# Altium PCB 变压器电源模块.PcbDoc
Units mm, origin at the board's own origin, x right, y up, seen from the top; angles counter-clockwise.
Board outline 152.4 x 101.6 mm, 2 copper layers (Top Layer, Bottom Layer); 21 components, 10 nets, 62 pads, 0 vias.
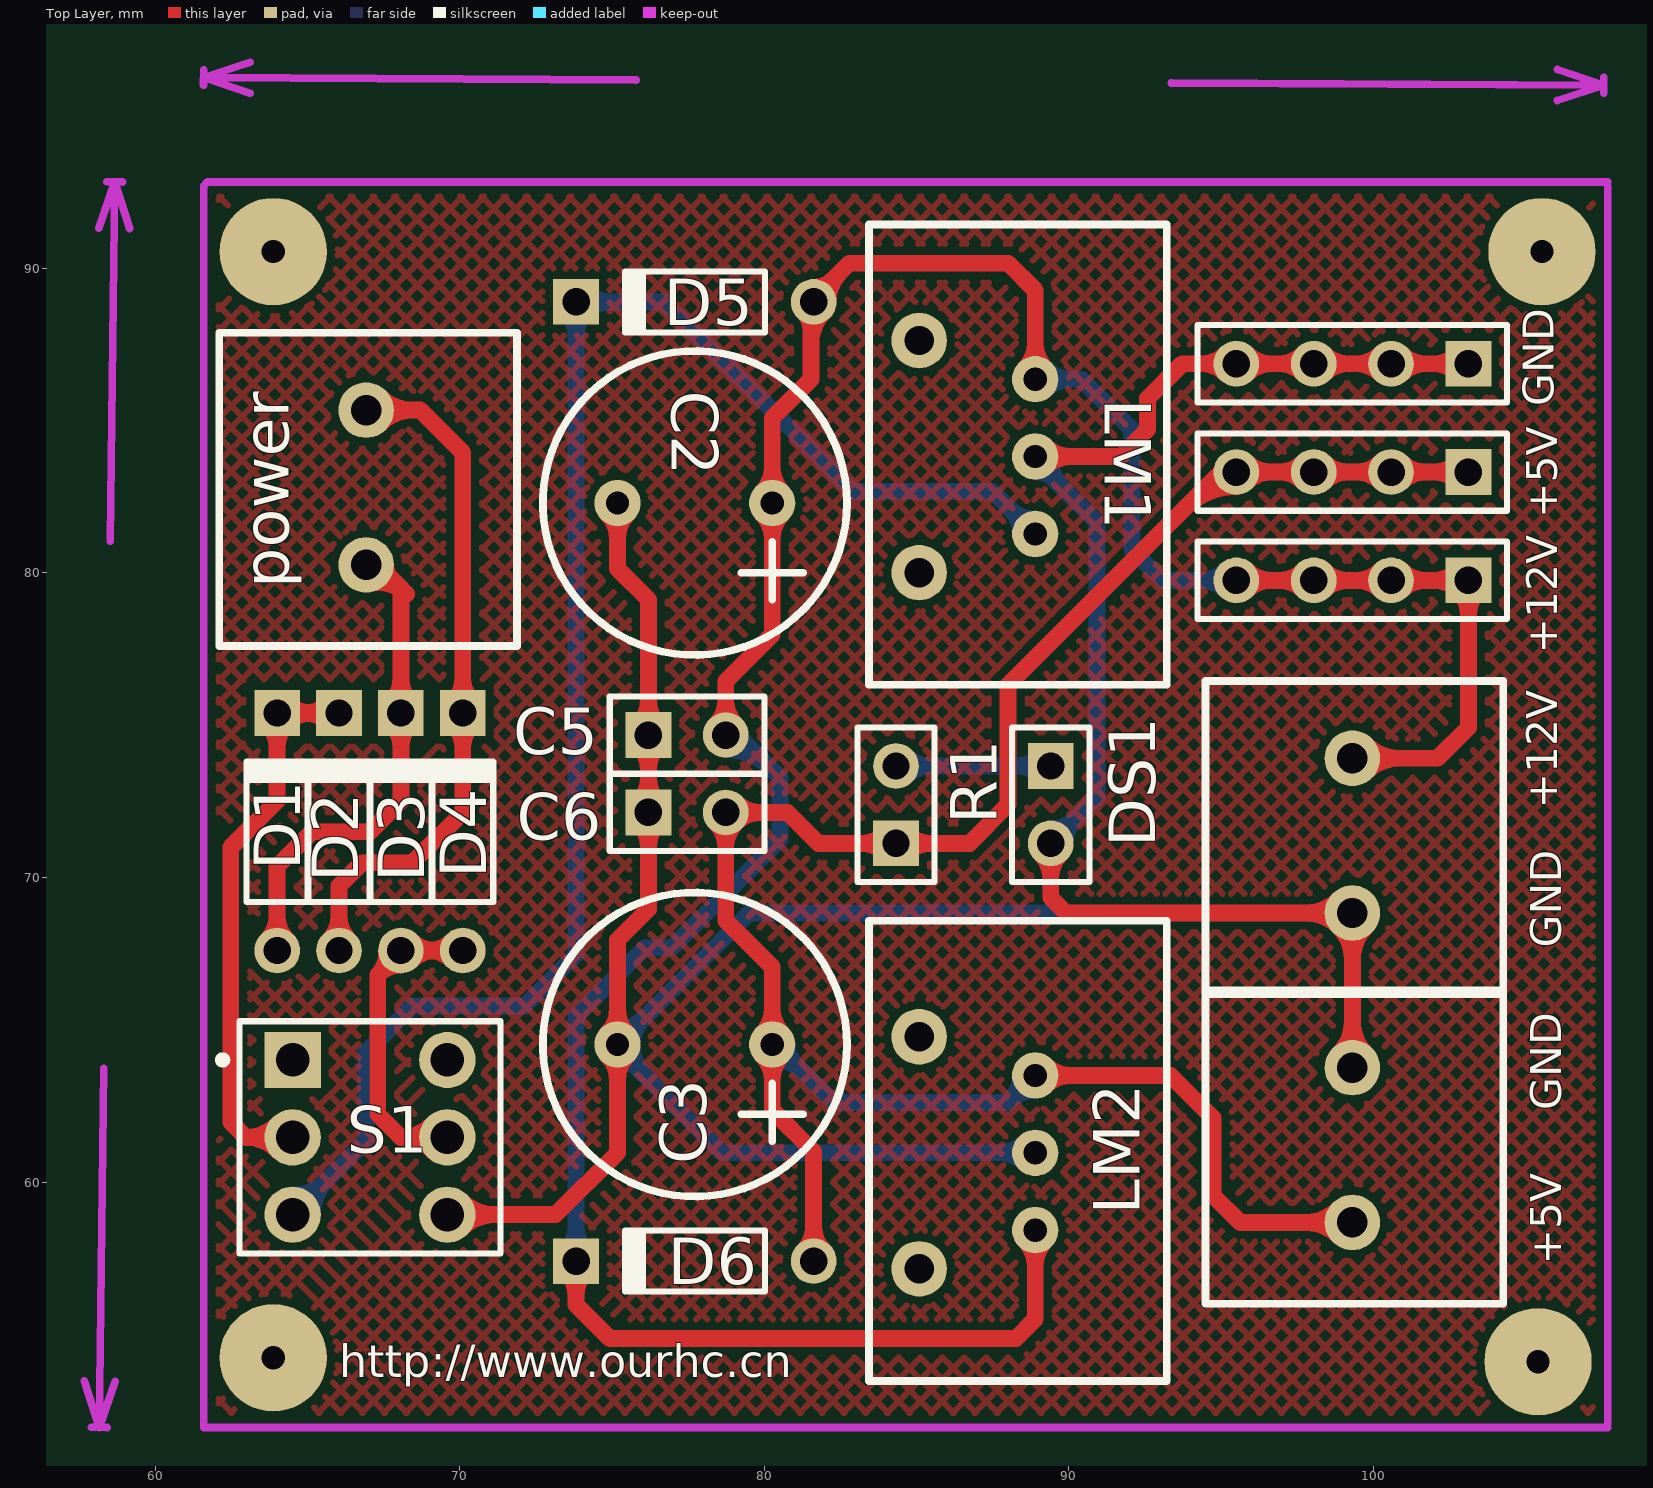
[diagram p0: Top Layer view]
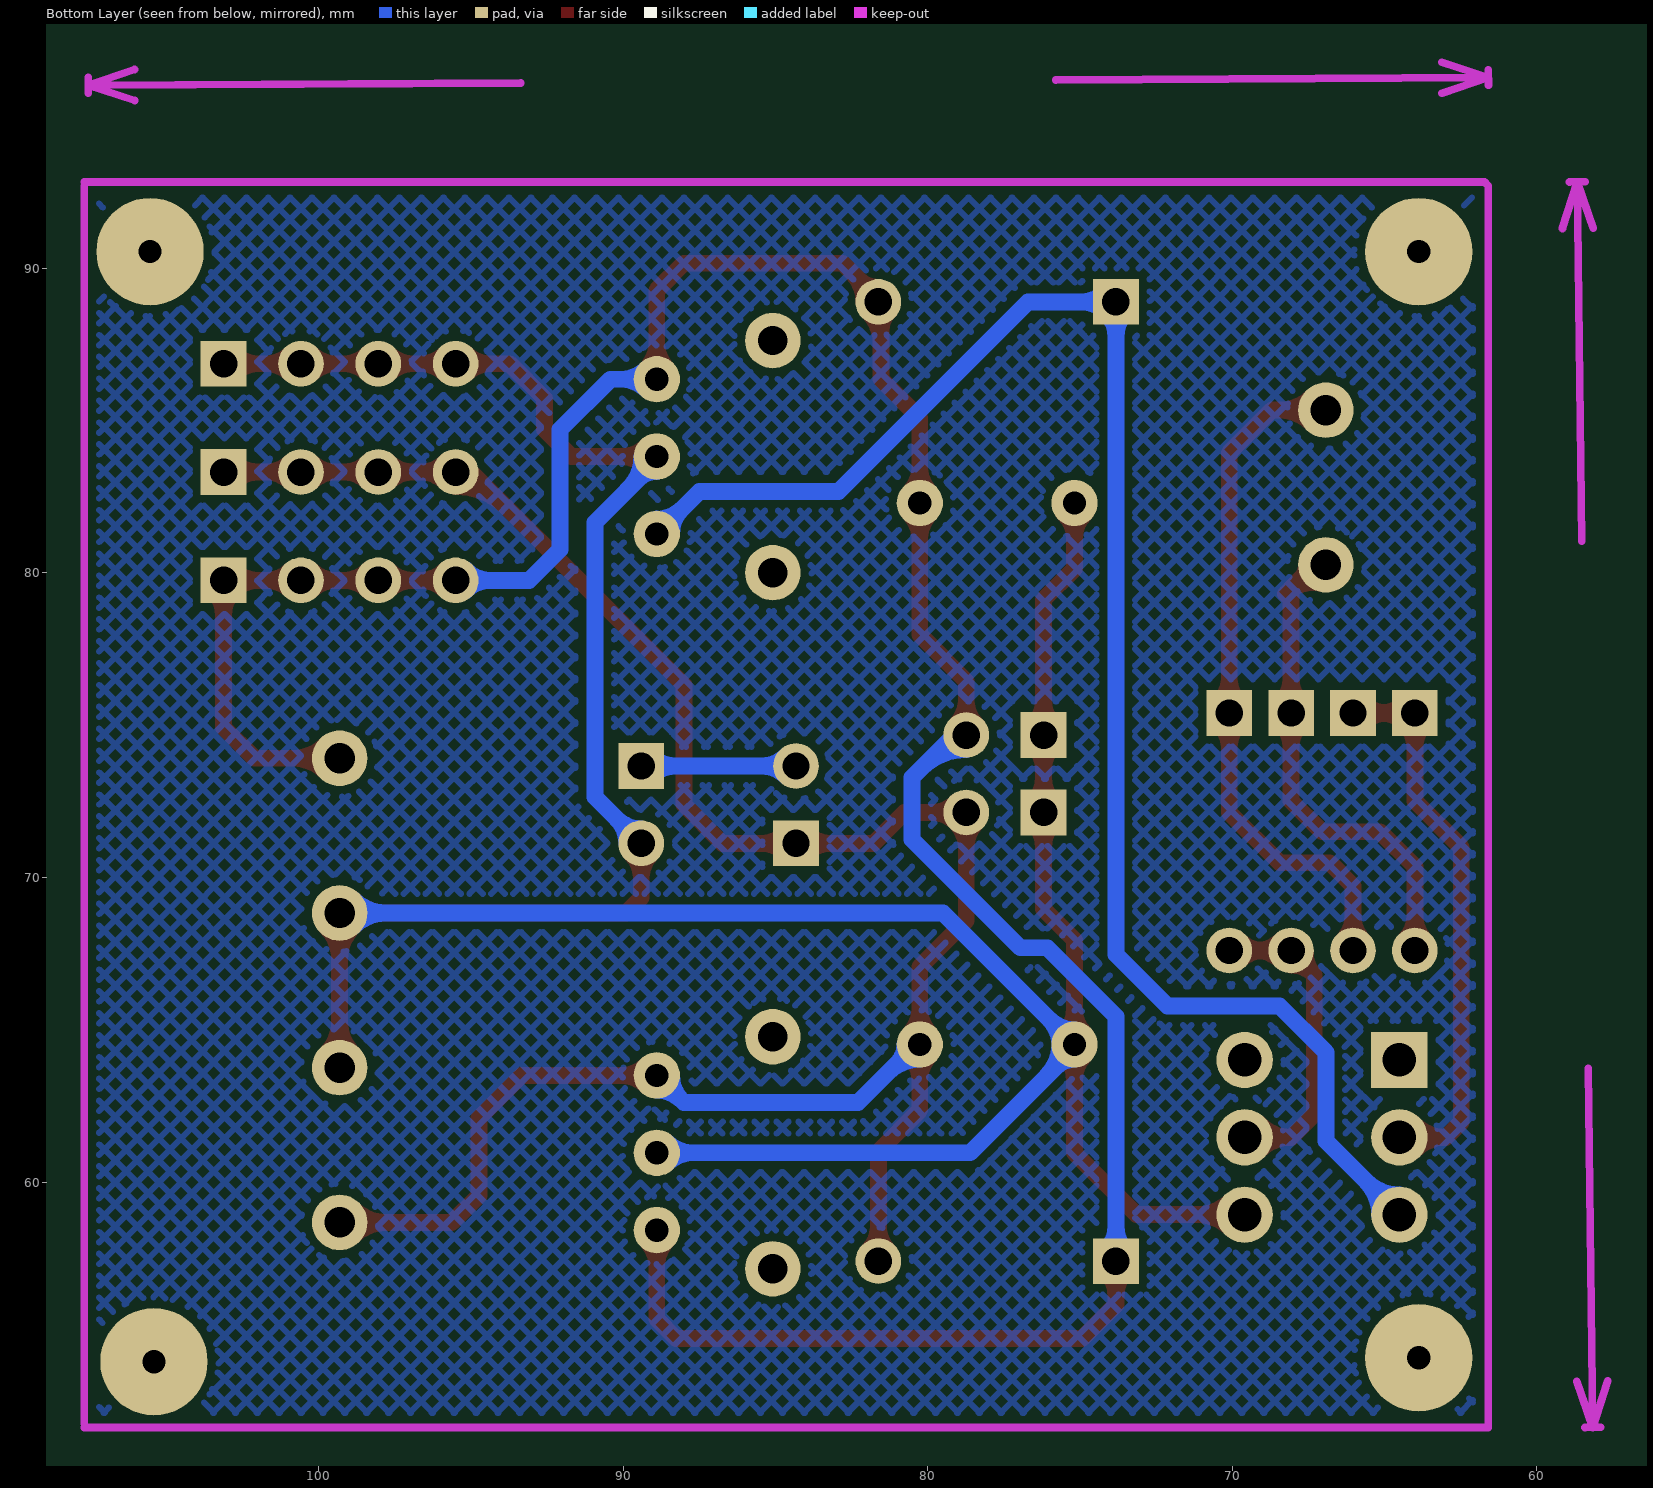
[diagram p1: Bottom Layer view, seen from below]

## Layer stack, top to bottom
Top Layer: signal copper 0.0356
Dielectric: dielectric 0.32, FR-4, Dk 4.8
Bottom Layer: signal copper 0.0356

## Board outline
25.4,25.4 177.8,25.4 177.8,127 25.4,127

## Design rules (kind name [scope] priority, off if disabled: settings)
Clearance [All] p1: gap=0.254
ComponentClearance [All] p1: gap=0.254 collisioncheckmode=3 verticalgap=0.254
PolygonConnect [All] p1: connectstyle=Relief reliefconductorwidth=0.254 reliefentries=4 polygonreliefangle="90 Angle"
RoutingVias [All] p1: holewidth=0.711 width=1.27 viastyle="Through Hole" minholewidth=0.711 minwidth=1.27 maxholewidth=0.711 maxwidth=1.27
SolderMaskExpansion [All] p1: expansion=0.102
TestPointUsage [All] p1: valid=0 allowmultiple=FALSE
Testpoint [All] p1: side=15 testpointundercomponent=TRUE minsize=1.016 maxsize=2.54 preferedsize=1.524 minholesize=0 maxholesize=1.016 preferedholesize=0.813 testpointgrid=0.025 style=1023 order=0-112345678
Width [All] p1: maxlimit=0.554 minlimit=0.554 preferedwidth=0.554
17 further rules are at their usual default settings.

## Classes and differential pairs
component class 变压器电源模块: +5V +12V C2 C3 C5 C6 D1 D2 D3 D4 D5 D6 DS1 GND LM1 LM2 power R1 S1

## Components (designator, comment, footprint, x,y, rotation, side; value= is the part's Value field where it differs from the comment)
+5V "Header 2" JK128 100.457,63.246 r0 top (schematic designator P5)
+5V "Header 4" HDR1X4 103.124,86.868 r180 top (schematic designator P3)
+12V "Header 2" JK128 100.457,73.406 r0 top (schematic designator P4)
+12V "Header 4" HDR1X4 103.124,79.756 r180 top (schematic designator P1)
C2 "" "C 220/50" 80.264,82.296 r270 top
C3 "" "C 220/50" 80.264,64.516 r270 top
C5 "" HDR1X2 76.2,74.676 r0 top
C6 "" HDR1X2 76.2,72.136 r0 top
D1 "" DIO7.8-4.6x2 64.008,71.501 r90 top
D2 "" DIO7.8-4.6x2 66.04,71.501 r90 top
D3 "" DIO7.8-4.6x2 68.072,71.501 r90 top
D4 "" DIO7.8-4.6x2 70.104,71.501 r90 top
D5 "" DIO7.8-4.6x2 77.724,88.9 r180 top
D6 "" DIO7.8-4.6x2 77.724,57.404 r180 top
DS1 "" HDR1X2 89.408,73.66 r270 top
GND "Header 4" HDR1X4 103.124,83.312 r180 top (schematic designator P2)
LM1 "" wyk 88.9,83.82 r90 top
LM2 "" wyk 88.9,60.96 r90 top
power "Header 2" JK128 68.072,84.836 r0 top
R1 "10k" HDR1X2 84.328,71.12 r90 top
S1 "" DPDT-6 67.056,61.468 r0 top

## Footprints (in the part's own frame and the unit in brackets; to place one, negate y for a bottom-side part, rotate by r counter-clockwise, add the part's x,y. Pads: shape width x height; smd on the part's side, far side on the other; paste and mask are expansions set on the pad)
"C 220/50" [mil]
  round 60 hole 30: 1(0,0) 2(0,-200)
  silkscreen extent -197,-296 197,97
DIO7.8-4.6x2 [mm] "Diode, Axial; Body 4.6 x 1.9 mm (LxDia. max), Lead Dia. 0.53 mm (max)"
  round 1.5 hole 0.9: 1(-3.9,0)
  rect 1.5x1.5 hole 0.9: 2(3.9,0)
  silkscreen extent -2.3,-1 2.4,1
DPDT-6 [mm] "Double-Pole, Double-Throw Switch; 6 Leads"
  rect 1.85x1.85 hole 1.1: 1(-2.54,2.54)
  round 1.85 hole 1.1: 2(-2.54,0) 3(-2.54,-2.54) 4(2.54,-2.54) 5(2.54,0) 6(2.54,2.54)
  silkscreen extent -4.96,-3.81 4.28,3.81
HDR1X2 [mm]
  rect 1.5x1.5 hole 0.9: 1(0,0)
  round 1.5 hole 0.9: 2(2.54,0)
  silkscreen extent -1.27,-1.27 3.81,1.27
HDR1X4 [mm]
  rect 1.5x1.5 hole 0.9: 1(0,0)
  round 1.5 hole 0.9: 2(2.54,0) 3(5.08,0) 4(7.62,0)
  silkscreen extent -1.27,-1.27 8.89,1.27
JK128 [mil]
  round 71.81 hole 39.37: 1(-45,20) 2(-45,-180)
  silkscreen extent -235,-285 150,120
wyk [mil]
  round 71.81 hole 37.87: 0(-150,150) 0(150,150)
  round 60 hole 30: 1(-100,0) 2(100,0) 3(0,0)
  silkscreen extent -295,-170 300,215

## Part data
+5V +12V power: "Header, 2-Pin"
+5V +12V GND: "Header, 4-Pin"
C2 C3: library part "Cap Pol1", "Polarized Capacitor (Radial)"
C5 C6: library part Cap, "Capacitor"
D1 D2 D3 D4 D5 D6: library part "Diode 1N4007", "1 Amp General Purpose Rectifier"
DS1: library part LED0, "Typical INFRARED GaAs LED"
LM1 LM2: library part "Volt Reg", "Voltage Regulator"
R1: library part RES1
S1: library part "SW DPDT", "Switch"

## Free pads (board coordinates)
  round 3.524 hole 0.762: 0(63.881,54.229) 0(63.881,90.551) 0(105.41,54.102) 0(105.537,90.551)

## Nets (pads, with @x,y where several pads share a name; then routed paths per layer and width w, separated by ;. In a path a pad name is that pad's centre, name@x,y a point inside that pad or via, vN(x,y) a via of type N, cw(c..) or ccw(c..) an arc to the next point about the centre after c; other vN are vias at no path point)
A05: +5V.2@99.314,58.674 C3.1 C6.2 D6.1 GND.1 GND.2 GND.3 GND.4 LM2.2 R1.1 | length 106
  Top Layer w0.554: C6.2@78.406,71.802 cw(c77.598,70.994) 78.74,70.994 cw(c79.882,70.994) 79.074,71.802 cw(c79.882,70.994) 79.882,72.136 cw(c79.882,73.278) C6.2@79.074,72.47 ; C6.2 80.772,72.136 81.788,71.12 86.741,71.12 88.011,72.39 88.011,76.327 94.996,83.312 GND.1 ; C6.2@78.74,72.39 78.74,68.58 80.264,67.056 80.264,62.357 81.624,60.997 D6.1 ; C3.1@79.921,64.173 cw(c79.093,63.345) 80.264,63.345 cw(c81.435,63.345) C3.1@80.607,64.173 ; C3.1@79.921,64.859 ccw(c79.093,65.687) 80.264,65.687 ccw(c81.435,65.687) C3.1@80.607,64.859 ; D6.1@81.29,57.738 ccw(c80.482,58.546) 81.624,58.546 ccw(c82.766,58.546) D6.1@81.958,57.738 ; R1.1@83.994,70.786 ccw(c83.186,69.978) 83.186,71.12 ccw(c83.186,72.262) R1.1@83.994,71.454 ; R1.1@84.662,70.786 cw(c85.47,69.978) 85.47,71.12 cw(c85.47,72.262) R1.1@84.662,71.454 ; LM2.2 93.345,63.5 94.742,62.103 94.742,59.563 95.631,58.674 +5V.2@99.314,58.674 ; LM2.2@89.243,63.157 cw(c90.071,62.329) 90.071,63.5 cw(c90.071,64.671) LM2.2@89.243,63.843 ; 93.829,82.145 cw(c95.504,80.471) GND.4@95.504,82.839 ; 94.775,83.091 cw(c95.504,82.362) GND.4@95.504,83.393 ; GND.4@95.838,82.978 cw(c96.646,82.17) 96.646,83.312 cw(c96.646,84.454) GND.4@95.838,83.646 ; GND.3@97.71,82.978 ccw(c96.902,82.17) 96.902,83.312 ccw(c96.902,84.454) GND.3@97.71,83.646 ; GND.3@98.378,82.978 cw(c99.186,82.17) 99.186,83.312 cw(c99.186,84.454) GND.3@98.378,83.646 ; +5V.2@98.865,58.225 ccw(c97.781,57.141) 97.781,58.674 ccw(c97.781,60.207) +5V.2@98.865,59.123 ; GND.2@100.25,82.978 ccw(c99.442,82.17) 99.442,83.312 ccw(c99.442,84.454) GND.2@100.25,83.646 ; GND.2@100.918,82.978 cw(c101.726,82.17) 101.726,83.312 cw(c101.726,84.454) GND.2@100.918,83.646 ; GND.1@102.79,82.978 ccw(c101.982,82.17) 101.982,83.312 ccw(c101.982,84.454) GND.1@102.79,83.646
  Bottom Layer w0.554: C3.1@80.264,64.031 cw(c80.264,62.553) 81.309,63.598 ; C3.1 80.391,64.516 82.296,62.611 88.011,62.611 LM2.2 ; C3.1@80.749,64.516 ccw(c81.613,64.516) 81.002,63.905 ; LM2.2@88.415,63.5 cw(c87.244,63.5) 88.072,62.672 cw(c88.9,61.844) LM2.2@88.9,63.015
A12: +12V.1 +12V.2@100.584,79.756 +12V.3 +12V.4 C2.1 C5.2 D5.1 D6.2 LM1.2 LM2.1 | length 133.1
  Top Layer w0.554: D6.2@73.49,57.07 cw(c72.682,56.262) 73.824,56.262 cw(c74.966,56.262) D6.2@74.158,57.07 ; D6.2 73.824,55.97 74.93,54.864 88.265,54.864 88.9,55.499 LM2.1 ; C5.2@78.406,75.01 ccw(c77.598,75.818) 78.74,75.818 ccw(c79.882,75.818) C5.2@79.074,75.01 ; C5.2 78.74,76.454 80.264,77.978 80.264,85.09 81.534,86.36 81.534,88.81 D5.1 81.624,88.99 82.804,90.17 88.011,90.17 88.9,89.281 LM1.2 ; C2.1@79.921,81.953 cw(c79.093,81.125) 80.264,81.125 cw(c81.435,81.125) C2.1@80.607,81.953 ; C2.1@79.921,82.639 ccw(c79.093,83.467) 80.264,83.467 ccw(c81.435,83.467) C2.1@80.607,82.639 ; D5.1@81.29,88.566 cw(c80.699,87.975) 81.534,87.975 ; 81.534,87.541 cw(c82.983,87.541) D5.1@81.958,88.566 ; D5.1@81.624,89.373 ccw(c81.624,90.298) 82.278,89.644 ; D5.1@82.097,88.9 cw(c83.456,88.9) 82.495,89.861 ; LM2.1@88.557,58.077 cw(c87.729,57.249) 88.9,57.249 cw(c90.071,57.249) LM2.1@89.243,58.077 ; LM1.2@88.557,86.703 ccw(c87.729,87.531) 88.9,87.531 ccw(c90.071,87.531) LM1.2@89.243,86.703 ; +12V.4 103.124,79.756 103.124,74.93 102.108,73.914 +12V.1@99.314,73.914 ; +12V.4@95.838,79.422 cw(c96.646,78.614) 96.646,79.756 cw(c96.646,80.898) +12V.4@95.838,80.09 ; +12V.3@97.71,79.422 ccw(c96.902,78.614) 96.902,79.756 ccw(c96.902,80.898) +12V.3@97.71,80.09 ; +12V.3@98.378,79.422 cw(c99.186,78.614) 99.186,79.756 cw(c99.186,80.898) +12V.3@98.378,80.09 ; +12V.1@99.763,73.465 cw(c100.847,72.381) 100.847,73.914 cw(c100.847,75.447) +12V.1@99.763,74.363 ; +12V.2@100.25,79.422 ccw(c99.442,78.614) 99.442,79.756 ccw(c99.442,80.898) +12V.2@100.25,80.09 ; +12V.2@100.918,79.422 cw(c101.726,78.614) 101.726,79.756 cw(c101.726,80.898) +12V.2@100.918,80.09 ; +12V.1@102.79,80.09 cw(c101.982,80.898) 101.982,79.756 cw(c101.982,78.614) 102.79,79.422 cw(c101.982,78.614) 103.124,78.614 cw(c104.266,78.614) +12V.1@103.458,79.422
  Bottom Layer w0.554: D6.2@73.49,57.738 ccw(c72.682,58.546) 73.824,58.546 ccw(c74.966,58.546) D6.2@74.158,57.738 ; D6.2 73.824,65.442 76.073,67.691 76.962,67.691 80.518,71.247 80.518,73.279 79.121,74.676 C5.2 ; C5.2@78.74,74.203 cw(c78.74,72.141) 80.198,73.599 ; LM1.2 90.424,86.36 92.075,84.709 92.075,80.772 93.091,79.756 +12V.4 ; LM1.2@89.243,86.017 cw(c90.071,85.189) 90.071,86.36 cw(c90.071,87.531) LM1.2@89.243,86.703 ; +12V.4@95.17,79.422 ccw(c94.362,78.614) 94.362,79.756 ccw(c94.362,80.898) +12V.4@95.17,80.09
AGND: +5V.1 +5V.2@100.584,86.868 +5V.3 +5V.4 +12V.2@99.314,68.834 C2.2 C3.2 C5.1 C6.1 DS1.2 LM1.3 LM2.3 S1.4 | length 167.1
  Top Layer w0.554: S1.4 73.152,58.928 75.184,60.96 75.184,67.945 76.2,68.961 76.2,79.121 75.184,80.137 C2.2 ; S1.4@70.054,58.47 cw(c71.16,57.364) 71.16,58.928 cw(c71.16,60.492) S1.4@70.054,59.386 ; C3.2@74.841,64.173 cw(c74.013,63.345) 75.184,63.345 cw(c76.355,63.345) C3.2@75.527,64.173 ; C3.2@74.841,64.859 ccw(c74.013,65.687) 75.184,65.687 ccw(c76.355,65.687) C3.2@75.527,64.859 ; C2.2@74.841,81.953 cw(c74.013,81.125) 75.184,81.125 cw(c76.355,81.125) C2.2@75.527,81.953 ; C6.1@75.866,71.802 cw(c75.058,70.994) 76.2,70.994 cw(c77.342,70.994) C6.1@76.534,71.802 ; C6.1@75.866,72.47 ccw(c75.058,73.278) 76.2,73.278 ccw(c77.342,73.278) C6.1@76.534,72.47 ; C5.1@75.866,74.342 cw(c75.058,73.534) 76.2,73.534 cw(c77.342,73.534) C5.1@76.534,74.342 ; C5.1@75.866,75.01 ccw(c75.058,75.818) 76.2,75.818 ccw(c77.342,75.818) C5.1@76.534,75.01 ; LM1.3 91.694,83.82 92.583,84.709 92.583,85.725 93.726,86.868 +5V.1@103.124,86.868 ; DS1.2@89.074,70.786 cw(c88.266,69.978) 89.408,69.978 cw(c90.55,69.978) DS1.2@89.742,70.786 ; LM1.3@89.243,83.477 cw(c90.071,82.649) 90.071,83.82 cw(c90.071,84.991) LM1.3@89.243,84.163 ; DS1.2 89.408,69.342 89.916,68.834 99.314,68.834 +5V.1@99.314,63.754 ; +5V.4@95.17,86.534 ccw(c94.362,85.726) 94.362,86.868 ccw(c94.362,88.01) +5V.4@95.17,87.202 ; +5V.4@95.838,86.534 cw(c96.646,85.726) 96.646,86.868 cw(c96.646,88.01) +5V.4@95.838,87.202 ; +5V.3@97.71,86.534 ccw(c96.902,85.726) 96.902,86.868 ccw(c96.902,88.01) +5V.3@97.71,87.202 ; +5V.3@98.378,86.534 cw(c99.186,85.726) 99.186,86.868 cw(c99.186,88.01) +5V.3@98.378,87.202 ; +5V.1@98.865,64.203 ccw(c97.781,65.287) 99.314,65.287 ccw(c100.847,65.287) +5V.1@99.763,64.203 ; +12V.2@98.865,69.283 cw(c97.781,70.367) 97.781,68.834 cw(c97.781,67.301) 98.865,68.385 cw(c97.781,67.301) 99.314,67.301 cw(c100.847,67.301) +12V.2@99.763,68.385 ; +5V.2@100.25,86.534 ccw(c99.442,85.726) 99.442,86.868 ccw(c99.442,88.01) +5V.2@100.25,87.202 ; +5V.2@100.918,86.534 cw(c101.726,85.726) 101.726,86.868 cw(c101.726,88.01) +5V.2@100.918,87.202 ; +5V.1@102.79,86.534 ccw(c101.982,85.726) 101.982,86.868 ccw(c101.982,88.01) +5V.1@102.79,87.202
  Bottom Layer w0.554: C3.2@75.184,64.031 cw(c75.184,63.167) 75.795,63.778 ; C3.2@75.184,65.001 ccw(c75.184,66.172) 76.012,65.344 ccw(c76.84,64.516) 75.669,64.516 ccw(c77.147,64.516) 76.102,63.471 ; LM2.3@88.557,60.617 ccw(c87.729,59.789) 87.729,60.96 ccw(c87.729,62.131) LM2.3@88.557,61.303 ; LM2.3 78.613,60.96 75.184,64.389 C3.2 79.502,68.834 +12V.2@99.314,68.834 ; LM1.3@88.9,83.335 cw(c88.9,82.471) 89.511,83.082 ; LM1.3 88.9,83.693 90.932,81.661 90.932,72.644 DS1.2 ; LM1.3@89.385,83.82 ccw(c90.863,83.82) 89.818,82.775 ; DS1.2@89.408,71.593 ccw(c89.408,72.735) 90.215,71.927 ccw(c91.023,71.12) DS1.2@89.881,71.12 ; +12V.2@98.865,68.385 ccw(c97.781,67.301) 97.781,68.834 ccw(c97.781,70.367) +12V.2@98.865,69.283
BGND: 
NetD1_1: D1.1 D3.2 power.2 | length 23.3
  Top Layer w0.554: D1.1@63.674,67.935 ccw(c62.866,68.743) 64.008,68.743 ccw(c65.15,68.743) D1.1@64.342,67.935 ; D1.1 64.008,70.358 65.151,71.501 67.056,71.501 68.072,72.517 68.072,79.502 67.31,80.264 power.2 ; power.2@67.077,79.646 cw(c67.37,78.419) 68.262,79.312 ; power.2@67.564,80.264 ccw(c68.177,80.264) 67.744,79.83 ; D3.2@67.738,75.067 cw(c66.93,74.259) 68.072,74.259 cw(c69.214,74.259) D3.2@68.406,75.067 ; D3.2@67.738,75.735 ccw(c66.93,76.543) 68.072,76.543 ccw(c69.214,76.543) D3.2@68.406,75.735
NetD1_2: D1.2 D2.2 S1.2 | length 26.1
  Top Layer w0.554: D1.2@63.674,75.067 cw(c62.866,74.259) 64.008,74.259 cw(c65.15,74.259) 64.342,75.067 cw(c65.15,74.259) 65.15,75.401 cw(c65.15,76.543) D1.2@64.342,75.735 ; S1.2@64.049,61.018 ccw(c62.992,60) 62.992,61.468 ; S1.2@64.049,61.918 cw(c62.992,62.936) 62.992,61.468 ; S1.2 62.992,61.468 ; D2.2@65.706,75.067 ccw(c64.898,74.259) 64.898,75.401 ccw(c64.898,76.543) D2.2@65.706,75.735 ; D2.2 D1.2 64.008,72.517 62.484,70.993 62.484,61.976 62.992,61.468
NetD2_1: D2.1 D4.2 power.1 | length 30.5
  Top Layer w0.554: D2.1@65.706,67.935 ccw(c64.898,68.743) 66.04,68.743 ccw(c67.182,68.743) D2.1@66.374,67.935 ; D2.1 66.04,69.723 66.802,70.485 68.453,70.485 70.104,72.136 70.104,83.947 68.707,85.344 power.1 ; power.1@67.378,84.895 cw(c68.462,83.811) 68.462,85.344 cw(c68.462,86.877) power.1@67.378,85.793 ; D4.2@69.77,75.067 cw(c68.962,74.259) 70.104,74.259 cw(c71.246,74.259) D4.2@70.438,75.067 ; D4.2@69.77,75.735 ccw(c68.962,76.543) 70.104,76.543 ccw(c71.246,76.543) D4.2@70.438,75.735
NetD3_1: D3.1 D4.1 S1.5 | length 17.9
  Top Layer w0.554: D3.1@67.601,67.562 cw(c66.664,67.485) 67.329,66.821 cw(c68.071,66.078) D3.1@68.072,67.128 ; D3.1@68.406,67.267 cw(c69.214,66.459) 69.214,67.601 cw(c69.214,68.743) D3.1@68.406,67.935 ; S1.5@69.129,61.018 ccw(c68.072,60) 68.072,61.468 ; S1.5@69.129,61.918 cw(c68.072,62.936) 68.072,61.468 ; S1.5 68.072,61.468 ; D4.1@69.77,67.267 ccw(c68.962,66.459) 68.962,67.601 ccw(c68.962,68.743) D4.1@69.77,67.935 ; D4.1 D3.1 68.072,67.564 67.31,66.802 67.31,62.23 68.072,61.468
NetD5_2: D5.2 LM1.1 S1.3 | length 62.5
  Top Layer w0.554: S1.3@64.516,58.547 S1.3
  Bottom Layer w0.554: S1.3 66.929,61.341 66.929,64.262 68.453,65.786 72.136,65.786 73.824,67.474 D5.2 76.708,88.9 82.931,82.677 87.503,82.677 LM1.1 ; S1.3@64.516,59.576 ccw(c64.516,61.14) 65.622,60.034 ccw(c66.728,58.928) S1.3@65.164,58.928 ; D5.2@73.49,88.566 cw(c72.682,87.758) 73.824,87.758 cw(c74.966,87.758) 74.158,88.566 cw(c74.966,87.758) 74.966,88.9 cw(c74.966,90.042) D5.2@74.158,89.234 ; LM1.1@88.415,81.28 ccw(c87.244,81.28) 88.072,82.108 ccw(c88.9,82.936) LM1.1@88.9,81.765
NetDS1_1: DS1.1 R1.2 | length 8.7
  Bottom Layer w0.554: R1.2 DS1.1 ; R1.2@84.662,73.326 cw(c85.47,72.518) 85.47,73.66 cw(c85.47,74.802) R1.2@84.662,73.994 ; DS1.1@89.074,73.326 ccw(c88.266,72.518) 88.266,73.66 ccw(c88.266,74.802) DS1.1@89.074,73.994
pads on no net: LM1.0 LM2.0 S1.1 S1.6

## Polygon pours and split planes (outlines as drawn)
no net on Top Layer (hatched 45Degree grid 0.508 track 0.203): 61.976,92.456 107.315,92.456 107.315,52.324 61.976,52.324
no net on Bottom Layer (hatched 45Degree grid 0.508 track 0.203): 62.103,92.329 107.315,92.329 107.315,52.324 62.103,52.324

## Keep-outs
Keep-Out Layer:
  lines w0.254: 57.677,53.473 58.166,51.943 ; 57.912,51.946 58.42,51.94 ; 58.147,91.319 58.674,92.837 ; 58.312,63.732 58.166,51.943 ; 58.42,92.84 58.928,92.834 ; 58.528,81.048 58.674,92.837 ; 58.693,53.461 58.166,51.943 ; 59.163,91.307 58.674,92.837 ; 61.594,96.012 61.596,96.52 ; 63.116,95.75 61.595,96.266 ; 63.122,96.766 61.595,96.266 ; 75.796,96.188 61.595,96.266 ; 93.368,96.09 107.569,96.012 ; 106.042,95.512 107.569,96.012 ; 106.048,96.528 107.569,96.012 ; 107.568,95.758 107.57,96.266 ; 107.696,51.943 61.595,51.943 61.595,92.71 61.722,92.837 107.696,92.837 ; 107.696,52.07 107.696,92.71
  text "45.9747 (mm)" at 76.045,95.272 h1.52 r359.68
  text "40.8971 (mm)" at 59.23,63.975 h1.52 r89.29

## Silkscreen, mask and mechanical layers (free items; w line width, h text height)
Top Overlay:
  text "GND" at 106.172,67.691 h1.02 r90
  text "GND" at 106.172,62.357 h1.02 r90
  text "http://www.ourhc.cn" at 66.04,53.594 h1.06